# Allegro board 20230215_beagleplayv022_10.brd
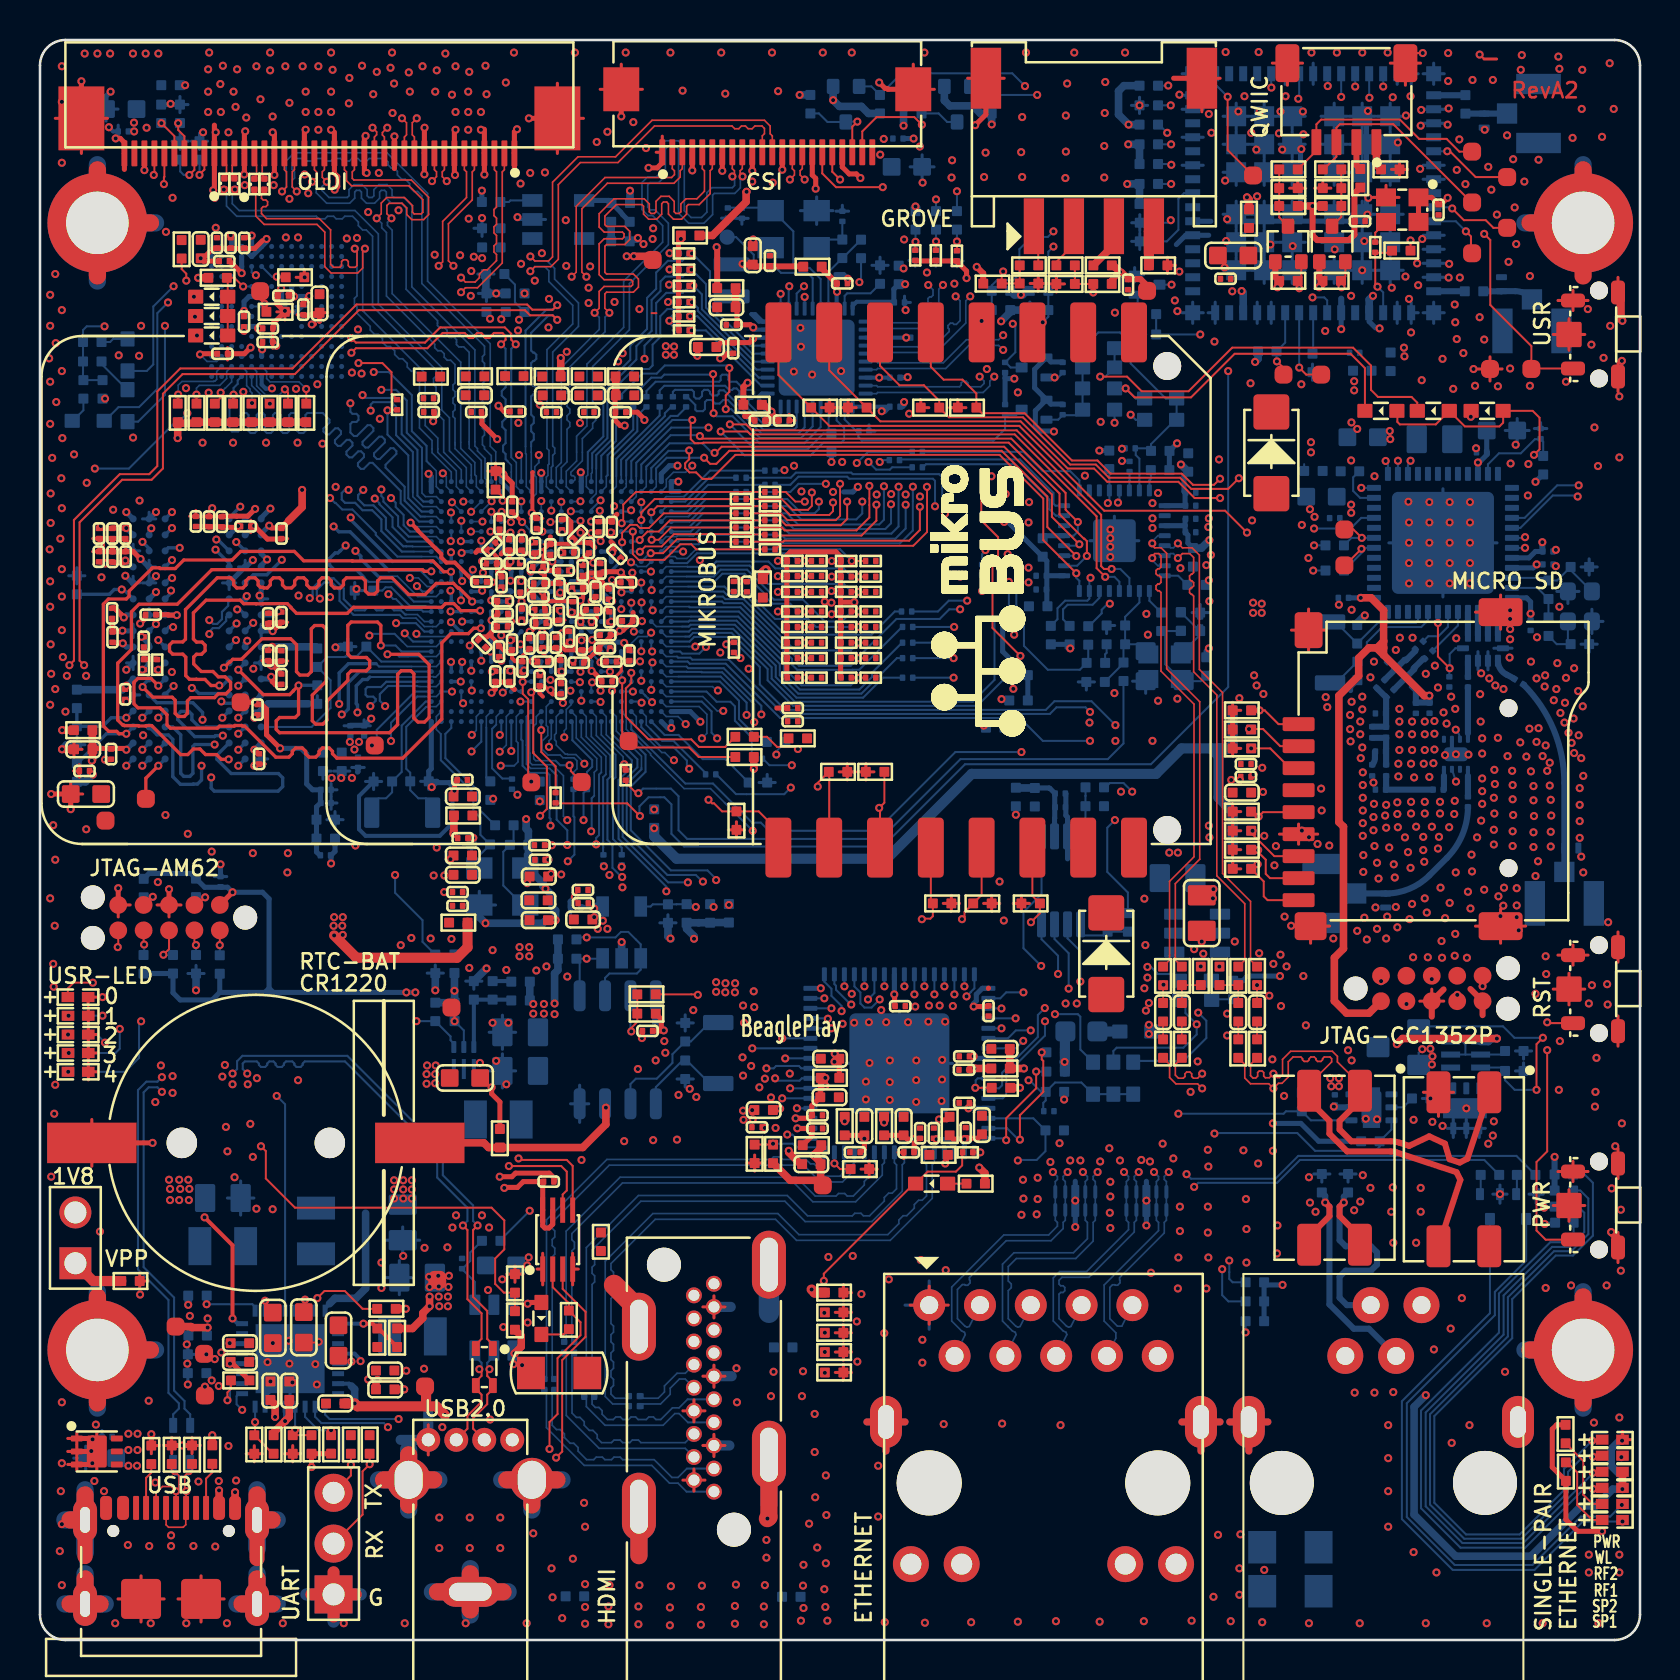
[diagram p0: board, top side]
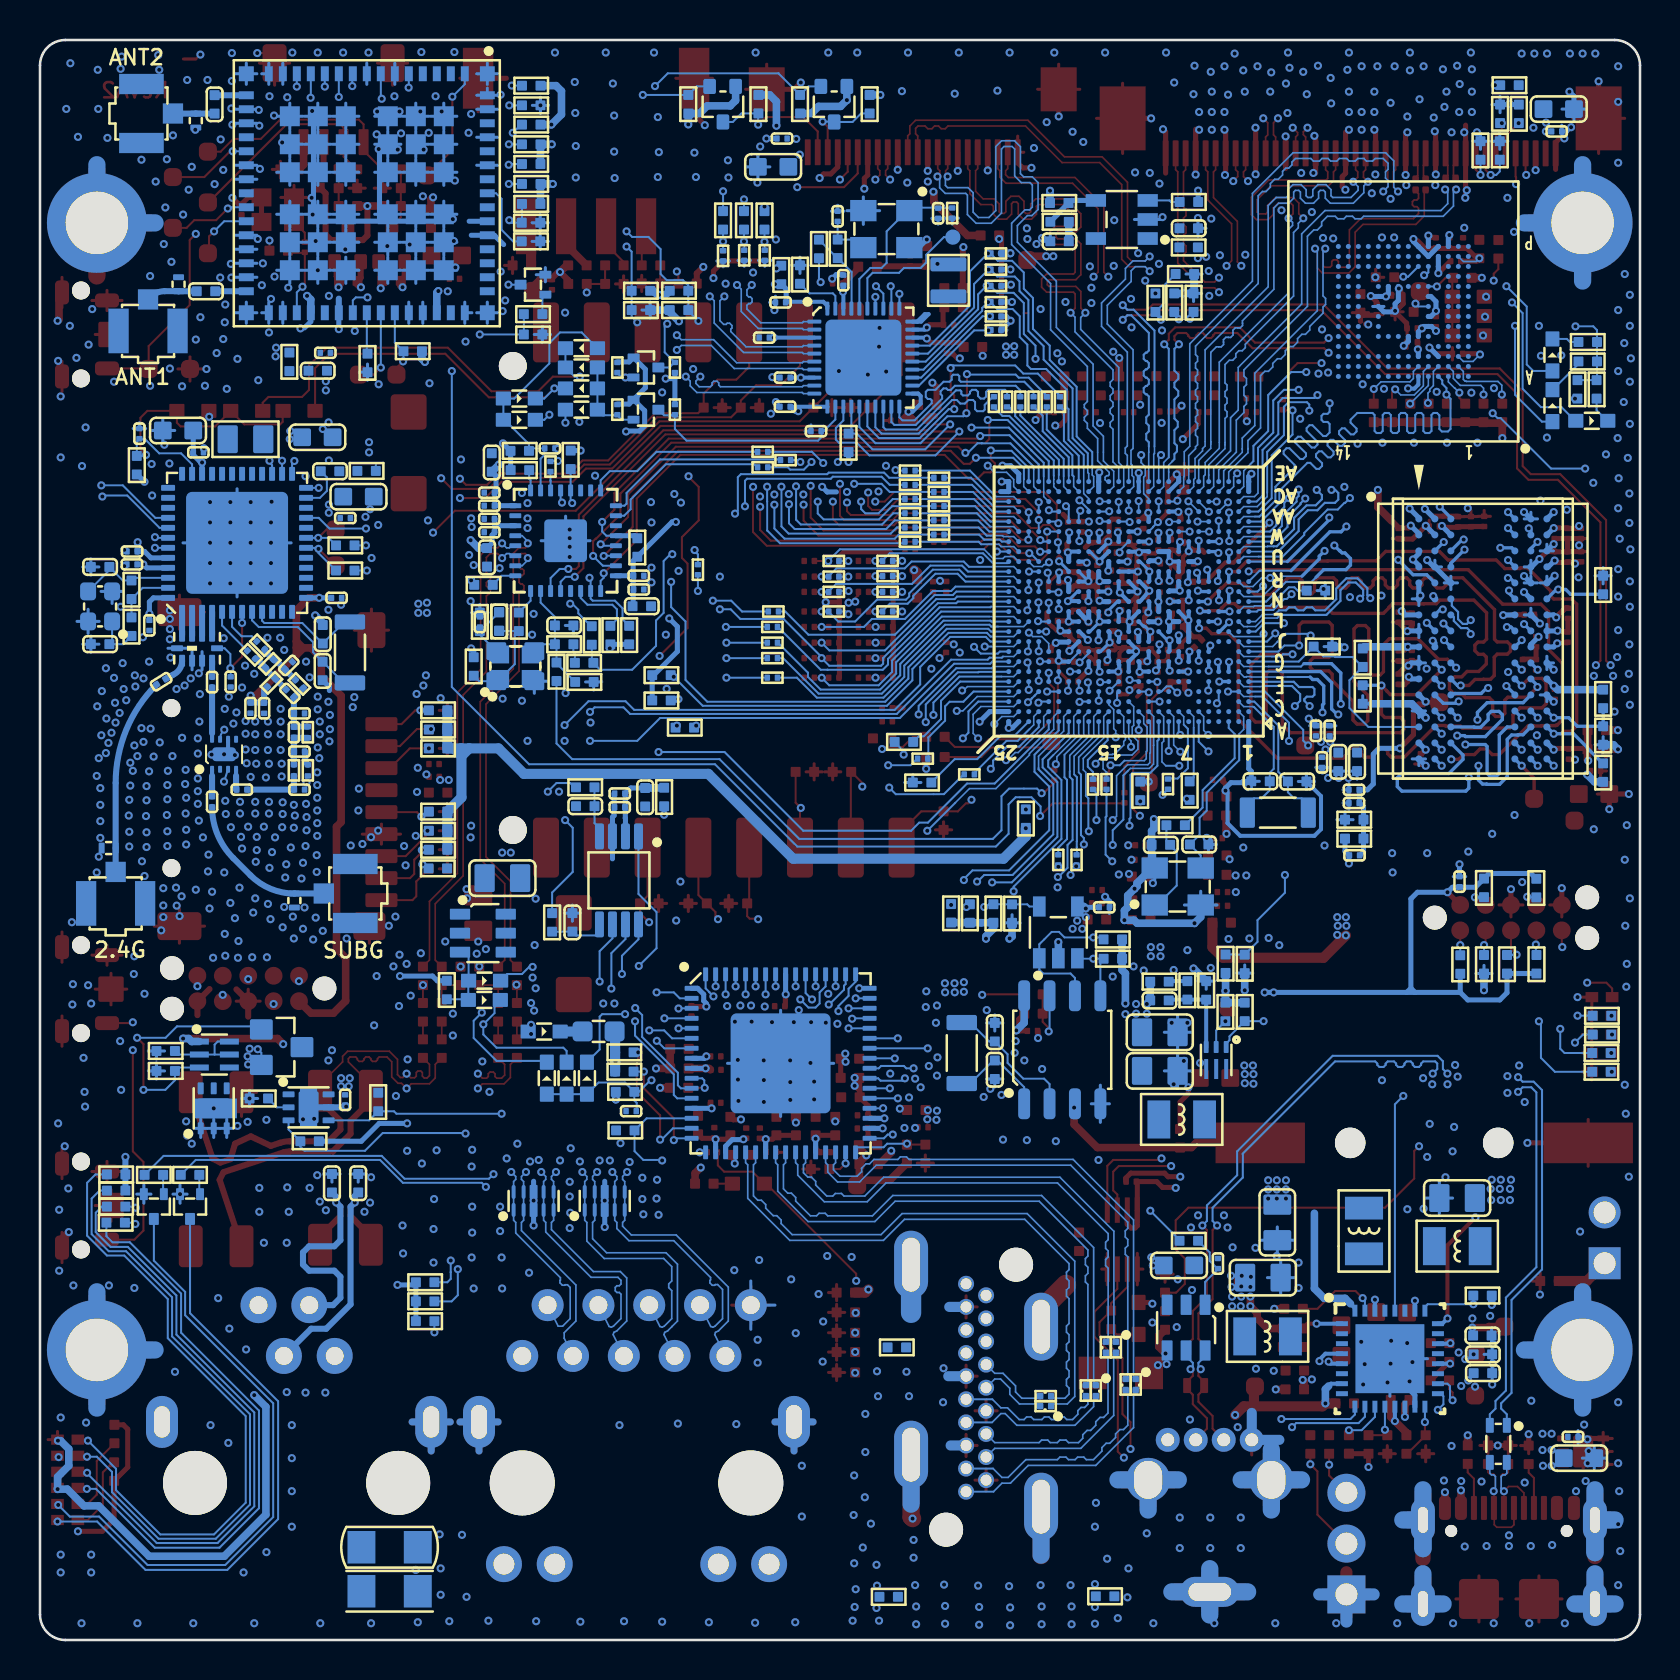
[diagram p1: board, bottom side, seen from below]

Outline 80 x 80 mm; copper layers: TOP, LYR2_GND, LYR3, LAY4_PWR1, LAY5_PWR2, LAY6, LYR7_GND, BOTTOM. Coordinates in mm from the lower left corner of the outline.
Outline path: 0,78.73 0,1.27 ; 0,78.73 arc(0.37,79.63) 1.27,80 ; 0,78.73 arc(0.37,79.63) 1.27,80 ; 0,78.73 0,1.27 ; 0,1.27 arc(0.37,0.37) 1.27,0 ; 0,1.27 arc(0.37,0.37) 1.27,0 ; 1.27,80 78.73,80 ; 1.27,80 78.73,80 ; 78.73,80 arc(79.63,79.63) 80,78.73 ; 78.73,80 arc(79.63,79.63) 80,78.73 ; 1.27,0 78.73,0 ; 1.27,0 78.73,0 ; 78.73,0 arc(79.63,0.37) 80,1.27 ; 78.73,0 arc(79.63,0.37) 80,1.27 ; 80,78.73 80,1.27 ; 80,78.73 80,1.27

## Design rules (mm)
constraint set DEFAULT: min track width 0.102
net group BL_PWM_3V3: nets BL_PWM_3V3 N16854428
net group BOOTMODE8: nets BOOTMODE8 VOUT0_D16
net group BOOTMODE9: nets BOOTMODE9 VOUT0_D17
net group BOOTMODE10: nets BOOTMODE10 VOUT0_D18
net group BOOTMODE12: nets BOOTMODE12 VOUT0_D20
net group BOOTMODE14: nets BOOTMODE14 VOUT0_D22
net group BOOTMODE15: nets BOOTMODE15 VOUT0_D23
net group CC1352_LED1: nets CC1352_LED1 N16855237
net group CC1352_LED2: nets CC1352_LED2 N16855239
net group CLS_SD: nets SD_CMD SD_D3
net group CSI0_GPIO2: nets CSI0_GPIO2 N16761119
net group DDR_ADDR_1: nets DDR_ALERTN DDR_TEN
net group DEBUG_RXD: nets DEBUG_RXD N16172168
net group EMMC_CLK: nets EMMC_CLK EMMC_CLK_S
net group GPIO1_10: nets GPIO1_10 N16149646
net group HDMI_TX0+: nets HDMI_TX0+ TX0P
net group HDMI_TX0-: nets HDMI_TX0- TX0M
net group HDMI_TX1+: nets HDMI_TX1+ TX1P
net group HDMI_TX1-: nets HDMI_TX1- TX1M
net group HDMI_TX2+: nets HDMI_TX2+ TX2P
net group HDMI_TX2-: nets HDMI_TX2- TX2M
net group HDMI_TXC+: nets HDMI_TXC+ TXCP
net group HDMI_TXC-: nets HDMI_TXC- TXCM
net group I2C0_SCL: nets I2C0_SCL N17822233
net group I2C1_SDA: nets I2C1_SDA N16835689
net group I2C2_SCL: nets I2C2_SCL N16786885
net group I2C3_SCL: nets I2C3_SCL N16071136
net group LED0: nets LED0 N16199587
net group LED0/CFG_EXT: nets LED0/CFG_EXT N17295734
net group LED1/CFG_LDO0: nets LED1/CFG_LDO0 N17295760
net group LED2: nets LED2 N16199659
net group LED2/CFG_LDO1: nets LED2/CFG_LDO1 N17295713
net group LED_USR0: nets LED_USR0 N16855227
net group LED_USR1: nets LED_USR1 N16855229
net group LED_USR2: nets LED_USR2 N16855231
net group LED_USR3: nets LED_USR3 N16855233
net group LED_USR4: nets LED_USR4 N16855235
net group MCASP1_ACLKX: nets MCASP1_ACLKX N16786926
net group MCASP1_AFSX: nets MCASP1_AFSX N16786954
net group MCASP1_AXR0: nets MCASP1_AXR0 N16786975
net group MCASP1_AXR1: nets MCASP1_AXR1 N16791385
net group MCASP1_AXR2: nets MCASP1_AXR2 N16786907
net group MCASP1_AXR3: nets MCASP1_AXR3 N16791404
net group MDI0: nets MDI0+ MDI0-
net group MDI1: nets MDI1+ MDI1-
net group MDI2: nets MDI2+ MDI2-
net group MDI3: nets MDI3+ MDI3-
net group N8507580: nets N8507580 N16164784
net group N8507584: nets N8507584 N16165479
net group N15956167: nets N15956167 N15956457
net group N15956763: nets N15956763 N15956767
net group N15956943: nets N15956943 N15956969
net group N15968666: nets N15968666 N15969255
net group N16005116: nets N16005116 N16005124
net group N16034871: nets N16034871 N17270663
net group N16199595: nets N16199595 N17845963
net group N16200287: nets N16200287 N17845881
net group N16213274: nets N16213274 N16213278
net group N16855241: nets N16855241 N16855367
net group N16856006: nets N16856006 N16856127
net group OLDI0_CLK0_N: nets N17355388 OLDI0_CLK0_N
net group OLDI0_CLK0_P: nets N17355379 OLDI0_CLK0_P
net group OLDI0_CLK1_N: nets N17355524 OLDI0_CLK1_N
net group OLDI0_CLK1_P: nets N17355497 OLDI0_CLK1_P
net group PMIC_LPM_EN0: nets N16004890 PMIC_LPM_EN0
net group PSE_P: nets PSE_N PSE_P
net group QWIIC_SCL: nets N16785638 QWIIC_SCL
net group QWIIC_SDA: nets N16785653 QWIIC_SDA
net group RGMII1_TD0: nets RGMII1_TD0 TXD0
net group RGMII1_TD1: nets RGMII1_TD1 TXD1
net group RGMII1_TD2: nets RGMII1_TD2 TXD2
net group RGMII1_TD3: nets RGMII1_TD3 TXD3
net group RGMII1_TX_CTL: nets RGMII1_TX_CTL TXCTL
net group RGMII1_TXC: nets RGMII1_TXC TXC
net group RMII2_TX_EN: nets RMII2_TX_EN SPE_TX_EN
net group RMII2_TXD0: nets RMII2_TXD0 SPE_TX_D0
net group RMII2_TXD1: nets RMII2_TXD1 SPE_TX_D1
net group RTC_INT: nets N16856066 RTC_INT
net group SD_CLK: nets N8487606 SD_CLK
net group UART6_RXD: nets N15962009 UART6_RXD
net group UART6_TXD: nets N15961979 UART6_TXD
net group USB0_DP: nets USB0_DM USB0_DP
net group USB1_DP: nets USB1_DM USB1_DP
net group USB1_DRVVBUS: nets N16650018 USB1_DRVVBUS
net group USB_A_DP: nets USB_A_DM USB_A_DP
net group USB_C_DP: nets USB_C_DM USB_C_DP
net group VOUT0_D0: nets N17701596 VOUT0_D0
net group VOUT0_D1: nets N17701573 VOUT0_D1
net group VOUT0_D2: nets N17701550 VOUT0_D2
net group VOUT0_D5: nets N17701481 VOUT0_D5
net group VOUT0_D6: nets N17701458 VOUT0_D6
net group VOUT0_D7: nets N17701435 VOUT0_D7
net group VOUT0_D8: nets N17701412 VOUT0_D8
net group VOUT0_D11: nets N17701343 VOUT0_D11
net group VOUT0_D12: nets N17701320 VOUT0_D12
net group VOUT0_D13: nets N17701297 VOUT0_D13
net group VOUT0_DE: nets N17701737 VOUT0_DE
net group VOUT0_HSYNC: nets N17701791 VOUT0_HSYNC
net group VOUT0_PCLK: nets N16120392 VOUT0_PCLK
net group VOUT0_VSYNC: nets N17701764 VOUT0_VSYNC
net group WL_CLK: nets N8498391 WL_CLK
net group WL_EN: nets N16855418 WL_EN
net group XO: nets N15938564 XO
net group BOOTMODE11: nets BOOTMODE3 BOOTMODE11 BOOTMODE13 N16788057 N16788120 N17041478 USER_BTN VOUT0_D19 VOUT0_D21
net group CC1352_RESET_N: nets CC1352_RESET_N CC1352_RSTN EMMC_RSTN GBE_RSTN HDMI_RSTN N8502406 N16005478 N17096912 N17316096 PORZ_OUT RESETN RESETSTATZ RST_N_N SD_PWR_EN SPE_RSTN
net group CLKOUT: nets CLKOUT CLKOUT0 N16100484 RMII2_REF_CLK RMII2_REF_CLK1 RMII2_REF_CLK2 XI
net group DDR_ADDR: nets DDR_A0 DDR_A1 DDR_A2 DDR_A3 DDR_A4 DDR_A5 DDR_A6 DDR_A7 DDR_A8 DDR_A9 DDR_A10 DDR_A11 DDR_A12 DDR_A13 DDR_A14_WEN DDR_A15_CAS DDR_A16_RAS DDR_ACTN DDR_BA0 DDR_BA1 DDR_CKE DDR_CSN DDR_ODT DDR_PARITY DDR_RESET#
net group DVI_+5V: nets DVI_+5V HDMI_DSCL HDMI_DSDA N17226817
net group HDMI_CEC: nets HDMI_CEC HDMI_CEC_D N8554336
net group I2C1_SCL: nets I2C1_SCL N16149634 N16835674 N17822331
net group MCU_OBSCLK0: nets MCU_OBSCLK0 N16822608 N17297363 XTAL_OUT
net group MG1_CSI: nets CAM_CK_N CAM_CK_P CAM_D0_N CAM_D0_P CAM_D1_N CAM_D1_P CAM_D2_N CAM_D2_P CAM_D3_N CAM_D3_P
net group MG1_DDR_D0: nets DDR_DQ0 DDR_DQ1 DDR_DQ2 DDR_DQ3 DDR_DQ4 DDR_DQ5 DDR_DQ6 DDR_DQ7 DDR_LDM
net group MG1_DDR_D1: nets DDR_DQ8 DDR_DQ9 DDR_DQ10 DDR_DQ11 DDR_DQ12 DDR_DQ13 DDR_DQ14 DDR_DQ15 DDR_UDM
net group MG1_OLDI_0: nets OLDI0_A0_N OLDI0_A0_P OLDI0_A1_N OLDI0_A1_P OLDI0_A2_N OLDI0_A2_P OLDI0_A3_N OLDI0_A3_P
net group MG1_OLDI_1: nets OLDI0_A4_N OLDI0_A4_P OLDI0_A5_N OLDI0_A5_P OLDI0_A6_N OLDI0_A6_P OLDI0_A7_N OLDI0_A7_P
net group MG1_RGMII_RX: nets RGMII1_RD0 RGMII1_RD1 RGMII1_RD2 RGMII1_RD3 RGMII1_RX_CTL RGMII1_RXC
net group N15956835: nets N15956835 N15956977 N15957113 N15957129 N15957145 N15957153 N15957165 N15957501 N15957559
net group N15957295: nets N15957295 N15957337 N15957739
net group POWER: nets N16785667 N16835703 N17701216 N17701257 N17701366 N17701389 N17701504 N17701527 PWR_BTN
net group RX_N: nets N15941865 N15941883 N15942117 N15942316 N15942320 RX_N TX_N
net group RX_P: nets N15941863 N15941871 N15942115 N15942312 N15942332 RX_P TX_P
net group SD: nets SD_D0 SD_D1 SD_D2
net group USB1_VBUS: nets USB1_VBUS
net group VOUT0_D3: nets VOUT0_D3
net group VOUT0_D4: nets VOUT0_D4
net group VOUT0_D9: nets VOUT0_D9
net group VOUT0_D10: nets VOUT0_D10
net group VOUT0_D14: nets VOUT0_D14
net group VOUT0_D15: nets VOUT0_D15
net group WKUP_CLKOUT0: nets N8521467 N8521963 N16005316 WKUP_CLKOUT0

## Placement (name value [footprint] x y rotation side)
B1  0900PC15A0036E  [BF10_0D5_2X1D25X1MM]  72.15 49.59 90 bottom
C1  33pF  [C0402]  57.04 50.92 90 bottom
C2  33pF  [C0402]  53.8 50.73 180 bottom
C3  10nF  [C0201]  57.54 55.39 0 bottom
C4  100nF  [C0201]  57.54 56.06 0 bottom
C5  1uF  [C0402]  57.65 54.13 270 bottom
C6  10nF  [C0201]  50.06 52.53 180 bottom
C7  100nF  [C0201]  50.06 53.21 180 bottom
C8  1uF  [C0402]  49.91 51.69 180 bottom
C9  10nF  [C0201]  57.54 57.37 0 bottom
C10  100nF  [C0201]  57.54 56.72 0 bottom
C11  1uF  [C0402]  57.41 58.88 90 bottom
C12  220nF  [C0402]  57.1 31.39 270 top
C13  220nF  [C0402]  56.16 31.39 270 top
C14  4.7nF  [C0402]  59.92 31.39 270 top
C15  4.7nF  [C0402]  60.85 31.39 270 top
C16  100pF  [C0402]  64.09 22.84 90 bottom
C17  100pF  [C0402]  65.4 22.84 90 bottom
C18  100pF  [C0201]  70.47 47.91 270 bottom
C19  100pF  [C0201]  71.4 47.9 270 bottom
C20  100nF  [C0201]  75.03 60.32 90 bottom
C21  100pF  [C0201]  71.4 41.91 270 bottom
C22  100pF  [C0201]  69.48 46.6 270 bottom
C23  10nF  [C0201]  68.8 46.59 270 bottom
C24  22uF  [C0603]  66.13 60.14 180 bottom
C25  100pF  [C0201]  69.91 42.52 180 bottom
C26  2.4pF  [C0201]  67.51 47.33 225 bottom
C27  0.8pF  [C0201]  67.31 45.39 270 bottom
C28  3pF  [C0201]  67.03 44.42 180 bottom
C29  4.7pF  [C0201]  67.03 42.52 180 bottom
C30  2.4pF  [C0201]  67.56 48.73 135 bottom
C31  3.9pF  [C0201]  67.03 46.33 180 bottom
C32  1uF  [C0402]  65.5 58.44 180 bottom
C33  24pF  [C0402]  65.87 48.45 270 bottom
C34  24pF  [C0402]  65.86 50.29 90 bottom
C35  7.5pF  [C0402]  77 49.79 0 bottom
C36  7.5pF  [C0402]  77 53.65 0 bottom
C37  22uF  [C0603]  64.08 57.17 180 bottom
C38  100nF  [C0201]  64.74 56.1 180 bottom
C39  100nF  [C0201]  65.17 52.11 180 bottom
C40  100nF  [C0201]  75.4 54.43 0 bottom
C41  100nF  [C0201]  72.08 59.39 180 bottom
C42  100nF  [C0201]  75.4 53.78 0 bottom
C43  100nF  [C0201]  74.53 50.73 270 bottom
C44  10uF  [C0603]  3.05 9.09 180 bottom
C45  12pF  [C0201]  73.95 47.92 328 bottom
C46  2.2uF  [C0402]  7.88 15.22 180 bottom
C47  2.2uF  [C0402]  7.86 14.28 180 bottom
C48  2.2uF  [C0402]  7.86 13.34 180 bottom
C49  2.2uF  [C0402]  14.76 11.83 180 top
C50  47uF  [C0805]  18.86 18.12 180 bottom
C51  22uF  [C0805]  56.88 38.09 0 bottom
C52  2.2uF  [C0402]  11.52 12.47 90 top
C53  2.2uF  [C0402]  12.46 12.47 90 top
C54  47uF  [C0805]  9.14 22.1 0 bottom
C55  100nF  [C0201]  25.44 22.92 0 top
C56  100nF  [C0201]  51.01 42.33 0 bottom
C57  22uF  [C0805]  58.09 36.35 270 top
C58  100nF  [C0201]  12.07 55.33 270 top
C59  100nF  [C0201]  3.56 44.3 270 top
C60  47uF  [C0805]  18.14 20.88 270 bottom
C61  100nF  [C0201]  46.21 28.51 180 top
C62  10uF  [C0603]  14.93 14.97 90 top
C63  10uF  [C0603]  13.19 15.63 270 top
C64  10uF  [C0603]  11.64 15.61 270 top
C65  100nF  [C0201]  12.17 67.22 180 top
C66  100nF  [C0201]  13.17 66.52 270 top
C67  100nF  [C0201]  10.2 65.92 90 top
C68  100nF  [C0201]  11.39 65.58 0 top
C69  4.7uF  [C0402]  13.98 66.83 270 top
C70  100nF  [C0201]  9.53 69.86 270 top
C71  100nF  [C0201]  8.85 69.86 270 top
C72  100nF  [C0201]  10.21 69.86 270 top
C73  100nF  [C0201]  11.39 64.9 0 top
C74  100nF  [C0201]  9.22 68.94 180 top
C75  4.7uF  [C0402]  8.04 69.55 270 top
C76  100nF  [C0201]  9.12 64.31 0 top
C77  4.7uF  [C0402]  60.1 42.37 180 top
C78  100nF  [C0201]  60.3 43.8 180 top
C79  100nF  [C0201]  60.3 43.16 180 top
C80  2.2uF  [C0402]  2.16 44.54 180 top
C81  100nF  [C0201]  3.62 54.16 90 top
C82  10nF  [C0201]  5.19 49.91 90 top
C83  10uF  [C0603]  59.66 69.23 180 top
C84  100nF  [C0201]  59.28 68.06 180 top
C85  100nF  [C0201]  65.74 64.36 180 bottom
C86  2.2uF  [C0402]  66.12 63.47 180 bottom
C87  100nF  [C0201]  69.93 71.51 270 top
C88  22pF  [C0201]  35.1 71.34 270 bottom
C89  22pF  [C0201]  40.12 71.19 90 bottom
C90  100nF  [C0201]  41.2 60.44 180 bottom
C91  4.7uF  [C0402]  34.32 66.64 180 top
C92  100nF  [C0201]  34.57 65.76 180 top
C93  1uF  [C0201]  36 60.97 180 top
C94  100nF  [C0201]  37.21 60.98 0 top
C95  4.7uF  [C0402]  33.36 64.65 180 top
C96  22uF  [C0603]  73.1 60.48 0 bottom
C97  1nF  [C1206]  62.52 4.64 180 bottom
C98  120pF  [C0402]  24.03 31.98 0 bottom
C99  100nF  [C0201]  12.07 48.04 90 top
C100  100nF  [C0201]  3.62 50.14 90 top
C101  100nF  [C0201]  2.22 43.46 180 top
C102  100nF  [C0201]  3.62 55.33 270 top
C103  2.2uF  [C0402]  17.26 13.47 0 top
C104  10uF  [C0402]  38.57 23.79 180 top
C105  100pF  [C0201]  11.41 49.23 270 top
C106  100pF  [C0201]  7.79 55.93 90 top
C107  100nF  [C0201]  34.66 64.59 270 top
C108  1uF  [C0201]  42.97 66.88 0 bottom
C109  22uF  [C0603]  2.3 42.3 180 top
C110  100uF  [C1206]  25.96 13.35 0 top
C111  10uF  [C0603]  23.05 18.73 180 bottom
C112  2.2uF  [C0402]  10 13.9 0 top
C113  2.2uF  [C0402]  17.26 12.53 0 top
C114  100nF  [C0201]  8.45 55.92 90 top
C115  100nF  [C0201]  3.61 51.33 270 top
C116  100nF  [C0201]  12.07 51.14 270 top
C117  100nF  [C0201]  10.96 44.06 270 top
C118  100nF  [C0201]  4.26 47.29 270 top
C119  100nF  [C0201]  5.54 51.27 180 top
C120  100nF  [C0201]  12.07 49.21 270 top
C121  100nF  [C0201]  14.27 39.24 180 bottom
C122  100nF  [C0201]  14.3 41.85 0 bottom
C123  100nF  [C0201]  10.88 46.52 270 top
C124  100nF  [C0201]  14.3 42.51 0 bottom
C125  2.2uF  [C0402]  10 14.84 0 top
C126  20pF  [C0402]  18.97 42.94 0 bottom
C127  20pF  [C0402]  17.14 42.93 180 bottom
C128  8pF  [C0402]  22.04 39.78 180 bottom
C129  8pF  [C0402]  23.96 39.76 0 bottom
C130  100nF  [C0201]  3.35 10.16 180 bottom
C131  100nF  [C0201]  21.1 18.82 90 bottom
C132  10uF  [C0402]  24.92 36.98 0 top
C133  10uF  [C0603]  21.25 28.1 0 top
C134  22uF  [C0805]  24.01 30.39 180 bottom
C135  22uF  [C0805]  24.01 28.46 180 bottom
C136  1uF  [C0201]  23.47 48.18 270 top
C137  1uF  [C0201]  25.14 48.92 0 top
C138  1uF  [C0201]  29.47 49.23 270 top
C139  1uF  [C0201]  28.57 48.92 0 top
C140  1uF  [C0201]  22.57 53.82 0 top
C141  1uF  [C0201]  29.3 52.88 0 top
C142  1uF  [C0201]  27.93 55.66 90 top
C143  1uF  [C0201]  28.26 50.24 0 top
C144  1uF  [C0201]  26.94 48.87 0 top
C145  100nF  [C0201]  21.12 43.01 180 top
C146  10nF  [C0201]  22.77 48.18 270 top
C147  4.7uF  [C0402]  21.14 42.17 180 top
C148  100nF  [C0201]  29.04 61.39 0 top
C149  10nF  [C0201]  26.43 54.37 0 top
C150  4.7uF  [C0402]  29.25 62.23 0 top
C151  100nF  [C0201]  25.57 61.39 0 top
C152  10nF  [C0201]  24.75 54.61 270 top
C153  4.7uF  [C0402]  25.6 62.23 0 top
C154  100nF  [C0201]  28.35 47.93 0 top
C155  100nF  [C0201]  19.43 62.09 180 top
C156  10nF  [C0201]  23.73 53.83 180 top
C157  1uF  [C0201]  19.44 61.4 180 top
C158  100nF  [C0201]  34.69 52.68 90 top
C159  10nF  [C0201]  26.18 53.48 180 top
C160  1uF  [C0201]  35.35 52.66 90 top
C161  100nF  [C0201]  37.64 46.6 0 top
C162  10nF  [C0201]  25.94 51.25 270 top
C163  1uF  [C0201]  37.64 45.94 0 top
C164  100nF  [C0201]  20.88 37.4 0 top
C165  10nF  [C0201]  24.1 51.3 90 top
C166  1uF  [C0201]  20.88 36.71 0 top
C167  100nF  [C0201]  24.09 54.75 270 top
C168  10nF  [C0201]  23.45 54.76 270 top
C169  1uF  [C0201]  23.76 61.43 180 top
C170  100nF  [C0201]  27.45 61.39 0 top
C171  10nF  [C0201]  26.1 55.77 90 top
C172  4.7uF  [C0402]  27.42 62.23 0 top
C173  100nF  [C0201]  21.81 61.4 180 top
C174  10nF  [C0201]  23.61 56.66 90 top
C175  4.7uF  [C0402]  21.75 62.24 180 top
C176  100nF  [C0201]  25.98 52.57 90 top
C177  1uF  [C0201]  21.14 40.09 0 top
C178  4.7uF  [C0402]  24.94 35.99 0 top
C179  4.7uF  [C0402]  21.14 39.23 0 top
C180  100nF  [C0201]  25.79 49.87 270 top
C181  100nF  [C0201]  22.98 55.8 90 top
C182  100nF  [C0201]  23.14 51.95 180 top
C183  100nF  [C0201]  26.45 50.18 270 top
C184  100nF  [C0201]  27.56 51.51 0 top
C185  100nF  [C0201]  24.47 49.82 270 top
C186  100nF  [C0201]  27.78 52.42 90 top
C187  100nF  [C0201]  25 51.51 0 top
C188  100nF  [C0201]  27.31 50.85 0 top
C189  100nF  [C0201]  25.05 50.85 0 top
C190  100nF  [C0201]  27.45 54.61 90 top
C191  100nF  [C0201]  27.14 53.48 270 top
C192  100nF  [C0201]  24.9 53.65 0 top
C193  100nF  [C0201]  22.6 54.68 225 top
C194  100nF  [C0201]  22.95 49.42 90 top
C195  100nF  [C0201]  24.95 52.83 0 top
C196  100nF  [C0201]  24.92 52.17 0 top
C197  100nF  [C0201]  24.02 52.65 270 top
C198  100nF  [C0201]  25.52 54.53 90 top
C199  100nF  [C0201]  26.64 51.66 90 top
C200  100nF  [C0201]  26.88 52.58 0 top
C201  100nF  [C0201]  27.1 49.76 270 top
C202  100nF  [C0201]  25.13 49.87 270 top
C203  10uF  [C0402]  21.14 38.26 0 top
C204  1uF  [C0402]  22.57 70.59 180 bottom
C205  100nF  [C0201]  22.09 49.82 135 top
C206  4.7uF  [C0402]  27.16 36.03 180 top
C207  1uF  [C0201]  27.16 36.84 180 top
C208  100nF  [C0201]  24.83 55.83 90 top
C209  100nF  [C0201]  27.15 37.5 180 top
C210  100nF  [C0201]  26.03 48.72 90 top
C211  100nF  [C0201]  29.38 50.95 0 top
C212  100nF  [C0201]  23.61 49.77 270 top
C213  100nF  [C0201]  28.46 51.15 90 top
C214  4.7uF  [C0402]  24.94 38.18 180 top
C215  1uF  [C0201]  25 39.01 180 top
C216  100nF  [C0201]  24.12 48.66 90 top
C217  100nF  [C0201]  28.02 53.57 270 top
C218  100nF  [C0201]  28.44 52.3 90 top
C219  100nF  [C0201]  28.24 49.59 180 top
C220  100nF  [C0201]  26.88 55.24 225 top
C221  100nF  [C0201]  24.98 47.97 270 top
C222  100nF  [C0201]  28.85 54.29 135 top
C223  100nF  [C0201]  28.59 55.65 90 top
C224  4.7uF  [C0402]  15.09 43.91 270 bottom
C225  1uF  [C0201]  15.9 43.88 270 bottom
C226  100nF  [C0201]  23.08 52.9 90 top
C227  100nF  [C0201]  23.14 51.32 180 top
C228  100nF  [C0201]  23.12 50.67 180 top
C229  100nF  [C0201]  15.52 45.46 90 bottom
C230  100nF  [C0201]  16.21 45.46 90 bottom
C231  10uF  [C0402]  14.15 43.91 270 bottom
C232  10nF  [C0201]  51.02 41.64 0 bottom
C233  1uF  [C0402]  49.74 42.14 270 bottom
C234  100pF  [C0402]  52.74 41.69 0 bottom
C235  100pF  [C0402]  53.38 35.88 90 bottom
C236  100nF  [C0201]  54.51 59.58 180 bottom
C237  10uF  [C0402]  39.5 29.06 180 top
C238  10uF  [C0402]  48.03 29.56 180 top
C239  100nF  [C0201]  40.75 24.39 180 top
C240  100nF  [C0201]  46.22 29.18 180 top
C241  100nF  [C0201]  38.87 26.23 0 top
C242  100nF  [C0201]  43.01 31.69 0 top
C243  100nF  [C0201]  46.21 26.86 180 top
C244  10uF  [C0402]  36.19 26.5 0 top
C245  100nF  [C0201]  35.85 25.64 0 top
C246  47pF  [C0201]  9.1 55.91 90 top
C247  100nF  [C0201]  46.29 25.37 90 top
C248  100nF  [C0201]  43.44 24.39 180 top
C249  100nF  [C0201]  47.43 31.45 270 top
C250  10uF  [C0402]  47.1 25.75 90 top
C251  100nF  [C0201]  38.88 25.58 0 top
C252  10uF  [C0402]  43.18 25.7 90 top
C253  100nF  [C0201]  54.4 67.77 270 top
C254  100nF  [C0201]  58.01 50.9 90 bottom
C255  100nF  [C0201]  66 70.94 0 top
C256  100pF  [C0402]  71.27 76.78 270 bottom
C257  100pF  [C0402]  71.7 67.44 0 bottom
C258  10uF  [C0603]  43.35 73.66 0 bottom
C259  100nF  [C0201]  42.9 75.07 0 bottom
C260  100nF  [C0201]  9.03 37.92 90 bottom
C261  2.7pF  [C0402]  32.26 28.51 270 bottom
C262  100nF  [C0201]  64.74 27 270 bottom
C263  1uF  [C0402]  29.02 69.94 0 bottom
C264  100nF  [C0201]  30.38 30.45 180 top
C265  2.7pF  [C0402]  32.26 30.39 90 bottom
C266  100nF  [C0201]  26.79 36.64 180 bottom
C267  100nF  [C0201]  4.17 75.43 180 bottom
C268  10uF  [C0603]  4.06 76.55 180 bottom
C269  1nF  [C0201]  44.01 25.34 90 top
C270  100nF  [C0201]  24.98 39.74 180 top
C271  10uF  [C0402]  41.22 25.7 90 top
C272  100nF  [C0201]  26.05 47.57 270 top
C273  100nF  [C0201]  22.07 52.91 180 top
C274  100nF  [C0201]  50.44 26.44 0 bottom
C275  10uF  [C0402]  39.48 27.14 0 top
C276  100nF  [C0201]  44.69 25.34 90 top
C277  10pF  [C0201]  4.29 54.17 90 top
C278  10pF  [C0201]  2.95 55.33 270 top
C279  10pF  [C0201]  11.41 51.09 270 top
C280  47pF  [C0201]  2.94 54.17 90 top
C281  1nF  [C0201]  4.27 55.33 270 top
C282  1nF  [C0201]  10.28 55.68 0 top
C294  100nF  [C0201]  42.75 61.67 0 bottom
C295  1uF  [C0201]  40.11 67.83 0 top
C296  100nF  [C0201]  42.75 63.12 0 bottom
C297  100nF  [C0201]  43.79 65.12 0 bottom
C298  100nF  [C0201]  39.84 67.99 90 bottom
C299  4.7uF  [C0402]  35.64 69.23 90 top
C300  100nF  [C0201]  36.5 68.96 90 top
D1  TPD4E05U06DQAR  [USON10_0D5_2D5X1X0D5MM]  55.32 21.95 180 bottom
D2  TPD4E05U06DQAR  [USON10_0D5_2D5X1X0D5MM]  51.77 21.95 180 bottom
D3  RB520S30T1G  [SOD_523]  72.36 61.46 180 top
D4  ESDPSA0402V05  [D0402]  39.71 16.38 180 top
D5  ESDPSA0402V05  [D0402]  39.71 17.37 180 top
D7  TPD1E1B04DPY  [D0402]  39.71 13.38 180 top
D8  TPD1E1B04DPY  [D0402]  15.54 9.78 270 top
D9  TPD1E1B04DPY  [D0402]  60.1 39.52 0 top
D10  TPD1E1B04DPY  [D0402]  16.48 9.78 270 top
D11  RB520S30T1G  [SOD_523]  69.67 61.46 180 top
D12  RB520S30T1G  [SOD_523]  67.05 61.46 180 top
D13  TPD1E1B04DPY  [D0402]  60.1 40.46 0 top
D14  TPD1E1B04DPY  [D0402]  60.1 41.42 0 top
D15  TPD1E1B04DPY  [D0402]  60.1 44.58 0 top
D16  TPD1E1B04DPY  [D0402]  60.1 45.52 0 top
D17  TPD1E1B04DPY  [D0402]  60.1 46.48 0 top
D18  TPD1E1B04DPY  [D0402]  60.1 38.56 0 top
D19  TPD1E1B04DPY  [D0402]  51.28 67.81 0 top
D20  TPD1E1B04DPY  [D0402]  49.45 67.83 180 top
D21  B130L-13-F  [DO_214AC_SMA]  53.31 34.32 90 top
D22  B130L-13-F  [DO_214AC_SMA]  61.57 59.36 90 top
D23  RB520S30T1G  [SOD_523]  4.38 61.72 90 bottom
D24  TPD1E1B04DPY  [D0402]  7.6 9.26 270 top
D25  TPD1E1B04DPY  [D0402]  6.59 9.26 270 top
D26  TPD1E1B04DPY  [D0402]  23 25.09 270 top
D27  TPD1E0B04DPY  [X1SON2_0D65_1X0_6X0_45MM]  76.57 39.6 180 bottom
D28  TPD1E0B04DPY  [X1SON2_0D65_1X0_6X0_45MM]  67.28 36.97 90 bottom
D29  TPD1E1B04DPY  [D0402]  64.6 72.59 0 top
D30  TPD1E1B04DPY  [D0402]  62.42 72.59 180 top
D31  TPD1E1B04DPY  [D0402]  34.82 40.97 90 top
D32  RB520S30T1G  [SOD_523]  52.93 61.52 0 bottom
D33  RB520S30T1G  [SOD_523]  52.93 63.63 0 bottom
D34  RB520S30T1G  [SOD_523]  52.93 64.59 0 bottom
D35  RB520S30T1G  [SOD_523]  53.67 28.09 90 bottom
D36  TPD1E1B04DPY  [D0402]  39.02 61.62 180 top
D37  TPD1E1B04DPY  [D0402]  40.87 61.62 0 top
D38  TPD1E1B04DPY  [D0402]  44.5 61.62 0 top
D39  TPD1E1B04DPY  [D0402]  46.36 61.62 0 top
D40  TPD1E1B04DPY  [D0402]  48.05 66.5 180 bottom
D41  TPD1E1B04DPY  [D0402]  49.53 36.83 0 top
D42  TPD1E1B04DPY  [D0402]  47.12 36.83 180 top
D43  TPD1E1B04DPY  [D0402]  45.11 36.83 180 top
D44  TPD1E1B04DPY  [D0402]  41.76 43.41 0 top
D45  TPD1E1B04DPY  [D0402]  39.9 43.41 180 top
D46  RB520S30T1G  [SOD_523]  56.03 62.07 180 bottom
D47  RB520S30T1G  [SOD_523]  8.59 67.17 180 top
D48  RB520S30T1G  [SOD_523]  8.59 66.2 180 top
D49  RB520S30T1G  [SOD_523]  4.38 64.26 90 bottom
D50  RB520S30T1G  [SOD_523]  57.77 32.97 180 bottom
D51  RB520S30T1G  [SOD_523]  57.79 32 180 bottom
D52  TPD1E1B04DPY  [D0402]  49.96 66.5 0 bottom
D53  RB520S30T1G  [SOD_523]  56.03 61.01 180 bottom
D54  RB520S30T1G  [SOD_523]  52.93 62.58 0 bottom
D55  RB520S30T1G  [SOD_523]  54.79 30.42 180 bottom
D56  RB520S30T1G  [SOD_523]  8.59 65.23 180 top
D57  ESDPSA0402V05  [D0402]  39.71 15.36 180 top
D58  RB520S30T1G  [SOD_523]  52.65 28.09 90 bottom
D59  RB520S30T1G  [SOD_523]  54.66 28.09 90 bottom
D60  ESDPSA0402V05  [D0402]  39.71 14.4 180 top
D61  RB520S30T1G  [SOD_523]  25.07 16.08 270 top
D63  RB520S30T1G  [SOD_523]  44.58 22.82 180 top
D66  RB520S30T1G  [SOD_523]  2.41 60.96 180 bottom
D73  TPD1E0B04DPY  [X1SON2_0D65_1X0_6X0_45MM]  72.21 75.97 90 bottom
D74  TPD1E0B04DPY  [X1SON2_0D65_1X0_6X0_45MM]  73.08 67.79 270 bottom
F1  100mA  [F0603]  52.07 30.43 180 bottom
FB1  120R  [L0402]  60.45 71.07 270 top
FB2  120R  [L0402]  67.53 63.91 270 bottom
FB3  120R  [L0402]  55.91 68.73 0 top
FB4  120R  [L0402]  2.16 45.49 0 top
FB5  120R  [L0402]  63.67 58.45 0 bottom
FB6  120R  [L0402]  21.16 41.23 0 top
FB7  120R  [L0402]  29.24 63.18 180 top
FB8  120R  [L0402]  25.58 63.18 180 top
FB9  120R  [L0402]  30.71 41.07 90 bottom
FB10  120R  [L0402]  19.55 63.17 0 top
FB11  120R  [L0402]  36.14 52.58 270 top
FB12  120R  [L0402]  37.89 45.08 180 top
FB13  120R  [L0402]  20.92 35.87 180 top
FB14  120R  [L0402]  23.72 63.2 0 top
FB15  120R  [L0402]  27.43 63.18 180 top
FB16  120R  [L0402]  21.76 63.18 0 top
FB17  120R  [L0402]  48.79 42.15 90 bottom
FB18  120R  [L0402]  39.5 28.11 0 top
FB19  120R  [L0402]  40.24 25.7 90 top
FB20  120R  [L0402]  38.6 24.74 0 top
FB21  120R  [L0402]  6.53 77.74 180 bottom
FB22  120R  [L0402]  45.48 25.7 90 top
FB23  120R  [L0402]  42.21 25.7 90 top
FB24  120R  [L0402]  48.03 28.58 0 top
FB25  120R  [L0402]  53.13 68.73 0 top
FB26  120R  [L0402]  51.28 68.73 0 top
FB27  120R  [L0402]  49.45 68.73 180 top
FB28  120R  [L0402]  62.42 73.53 180 top
FB29  120R  [L0402]  34.32 67.6 0 top
FB30  0R  [R0402]  38.63 68.67 180 top
FB31  0R  [R0402]  35.63 61.76 0 top
FB32  120R  [L0402]  42.94 68.26 90 bottom
FB33  120R  [L0402]  64.6 73.53 0 top
FB34  120R  [L0402]  66.01 73.09 270 top
FB35  120R  [L0402]  67.52 73.53 0 top
FB36  0R  [R0402]  26.75 2.18 0 bottom
FB37  0R  [R0402]  37.57 2.16 180 bottom
FB38  0R  [R0402]  28.05 19.91 270 top
FB39  0R  [R0402]  37.16 14.63 180 bottom
FL2  120R  [L0402]  22.57 69.63 0 bottom
J1  ST-TF-003J  [MICRO_SD_ST_TF_003A_16_1X14_5MM]  62.93 43.54 0 top
J2  LPJE158-0CNL  [RJ11_6P4C_1D27_21_15X13_8X13_3]  67.17 7.85 0 top
J3  U.FL-R-SMT-1(10)  [U-FL3P-SMD-2_6X2_6X1_0MM]  74.93 76.33 180 bottom
J4  TYPE_A  [HDMI19P_1D155_23_1X7_7X16_4MM]  33.2 5.52 0 top
J5  U.FL-R-SMT-1(10)  [U-FL3P-SMD-2_6X2_6X1_0MM]  74.6 65.46 90 bottom
J6  Header 1x3 2.54mm  [HEADER3P_2D54_DIP]  14.68 4.82 180 top
J7  4P-2.0mm-90D  [JST4P_SMD_2_0_90D]  52.7 70.69 0 top
J8  FPC 40pin-0.5mm  [FPC40_0D5_25_4X5_25X2MM]  13.97 74.63 180 top
J9  U.FL-R-SMT-1(10)  [U-FL3P-SMD-2_6X2_6X1_0MM]  64.24 37.33 0 bottom
J10  CR1220  [BAT-CR1220]  10.79 24.86 90 top
J11  TC2050-IDC  [CONNECT10_1D27_12_4X6_7MM]  69.59 32.58 0 top
J12  U.FL-R-SMT-1(10)  [U-FL3P-SMD-2_6X2_6X1_0MM]  76.22 36.83 90 bottom
J13  ST-USB-117A  [USB7P_1R4_14X5R72MM]  21.51 10.01 90 top
J14  TYPE-C 2.0  [USB2_0_TYPE_C]  6.55 6.55 90 top
J16  Header 1x2 2.54mm  [HEADER2P_2D54_DIP]  1.77 20.11 180 top
J17  FPC 22P 0.5mm  [FPC22_0D5_15_4X5_25X2MM_0D5_DX_NPWB]  36.37 74.69 180 top
J18  4P-1.0mm  [JST4P_1D0_6_5X4_35X3_1MM]  65.32 74.9 180 top
J19  TC2050-IDC  [CONNECT10_1D27_12_4X6_7MM]  6.45 36.12 180 top
J21  MikroBus Female  [MIKROBUS16_2D54_25_4X22_88X8_5MM]  45.81 52.5 180 top
J24  LPJG0933H11NL  [RJ45_18P_21_23X15_93X13_3MM]  50.18 7.85 0 top
L1  500uH  [L4P_2D54_9_2X6X5MM]  64.73 23.61 270 top
L2  500uH  [L4P_2D54_9_2X6X5MM]  71.2 23.54 270 top
L3  6.8uH  [L0805]  69.73 60.04 0 bottom
L4  90R  [L2012]  22.22 13.65 270 top
L5  12nH  [L0201]  68.43 47.86 315 bottom
L6  1nH  [L0201]  69.44 49.26 225 bottom
L7  27nH  [L0201]  68.52 48.81 315 bottom
L8  4.7nH  [L0201]  67.31 43.48 270 bottom
L9  3.9nH  [L0201]  66.61 45.39 270 bottom
L10  1nH  [L0201]  68.96 49.74 225 bottom
L11  12nH  [L0201]  67.03 47.81 225 bottom
L12  2.5nH  [L0201]  66.61 43.48 90 bottom
L13  90R  [L2012]  7.08 9.81 270 bottom
L14  0.33uH  [L1008]  18.62 15.18 0 bottom
L15  90R  [L4P_0_85X0_65MM]  10.97 72.78 0 top
L16  0.47uH  [L1008]  13.8 20.45 90 bottom
L17  0.47uH  [L1008]  9.14 19.69 180 bottom
L18  0.47uH  [L1008]  22.92 26.03 0 bottom
L19  2.2uH  [L2016]  34.58 67.98 90 bottom
L20  90R  [L4P_0_85X0_65MM]  9.47 72.83 0 top
L21  90R  [L4P_0_85X0_65MM]  25.47 12.76 0 bottom
L22  90R  [L4P_0_85X0_65MM]  26.46 14.62 0 bottom
L23  90R  [L4P_0_85X0_65MM]  27.46 12.45 0 bottom
L24  90R  [L4P_0_85X0_65MM]  29.74 11.94 90 bottom
LED1  Yellow  [LED0402]  78.62 6.8 0 top
LED2  Green  [LED0402]  78.62 6 0 top
LED3  Green  [LED0402]  1.9 32.15 0 top
LED4  Green  [LED0402]  1.91 31.21 0 top
LED5  Green  [LED0402]  1.91 30.27 0 top
LED6  Green  [LED0402]  1.91 29.35 0 top
LED7  Green  [LED0402]  1.91 28.41 0 top
LED8  Yellow  [LED0402]  78.62 7.61 0 top
LED9  Yellow  [LED0402]  78.62 8.41 0 top
LED10  Yellow  [LED0402]  78.62 9.21 0 top
LED11  Red  [LED0402]  78.62 10.02 0 top
MH1  Hole 3d125MM  [PTH_3_125MM_5]  77.16 14.5 0 top
MH2  Hole 3d125MM  [PTH_3_125MM_5]  2.87 14.5 0 top
MH3  Hole 3d125MM  [PTH_3_125MM_5]  2.87 70.86 0 top
MH4  Hole 3d125MM  [PTH_3_125MM_5]  77.16 70.86 0 top
NOREF  -  []  1.27 0 90 top
NOREF#2  -  []  0 78.73 0 top
NOREF#3  -  []  -86.59 -230.71 0 top
OSC1  32.768kHz  [X4-SMD-2_5X2_0X1_0MM]  68.12 71.52 180 top
OSC2  50MHz  [X4_SMD_2_5X2_0MM]  56.24 48.69 180 bottom
Q3  DMG1012T-7  [SOT_523]  72.5 21.67 180 bottom
Q4  DMG1012T-7  [SOT_523]  74.31 21.67 180 bottom
Q5  CJ3407  [SOT23]  67.92 29.64 270 bottom
Q6  BSS138W  [SOT-323-3]  62.4 69.8 0 top
Q7  BSS138W  [SOT-323-3]  64.6 69.8 0 top
Q8  BSS138W  [SOT-323-3]  40.29 76.79 0 bottom
Q9  BSS138W  [SOT-323-3]  45.86 76.79 0 bottom
Q10  DMG1012T-7  [SOT_523]  55.35 67.77 270 bottom
Q12  BCM857BS-7-F  [SMINI6-F3-B]  71.28 29.27 90 bottom
Q13  DMG1012T-7  [SOT_523]  49.7 61.52 90 bottom
Q14  DMG1012T-7  [SOT_523]  49.7 63.63 90 bottom
R1  240R  [R0402]  1.84 52.75 90 bottom
R2  33R  [R0201]  5.86 48.77 90 top
R3  33R  [R0201]  5.2 48.77 90 top
R4  10K  [R0402]  1.84 43.37 90 bottom
R5  49.9K  [R0402]  13.31 61.36 90 top
R6  49.9K  [R0402]  12.4 61.36 90 top
R7  49.9K  [R0402]  10.57 61.36 90 top
R8  49.9K  [R0402]  7.83 61.36 90 top
R9  49.9K  [R0402]  6.89 61.36 90 top
R10  49.9K  [R0402]  11.48 61.36 90 top
R11  49.9K  [R0402]  9.66 61.36 90 top
R12  49.9K  [R0402]  8.74 61.36 90 top
R13  49.9K  [R0402]  7.08 69.54 270 top
R14  10K  [R0402]  8.88 68.11 0 top
R15  10K  [R0402]  11.78 66.41 0 top
R16  0R  [R0201]  17.86 61.77 90 top
R17  10K  [R0402]  55.45 69.93 180 bottom
R18  10K  [R0402]  55.44 71.81 180 bottom
R19  10K  [R0402]  61.37 64.44 180 bottom
R20  49.9K  [R0402]  12.75 68.14 0 top
R21  10K  [R0402]  60.11 38.58 0 bottom
R22  49.9K  [R0402]  55.44 76.73 180 bottom
R23  10K  [R0402]  55.44 77.72 0 bottom
R24  10K  [R0402]  55.44 75.77 0 bottom
R25  10K  [R0402]  55.44 74.79 0 bottom
R26  10K  [R0402]  55.44 73.8 0 bottom
R27  10K  [R0402]  55.44 72.8 0 bottom
R28  10K  [R0402]  63.63 63.86 270 bottom
R29  10K  [R0402]  55.35 65.28 180 bottom
R30  0R  [R0402]  68.07 69.47 180 top
R31  33R  [R0201]  66.76 69.64 270 top
R32  0R  [R0402]  32.51 70.23 0 top
R33  2.49K  [R0402]  42 68.27 90 bottom
R34  0R  [R0402]  60.74 15.94 180 bottom
R35  0R  [R0402]  43.78 70.98 90 bottom
R36  10K  [R0201]  51.13 61.52 270 bottom
R37  10K  [R0201]  48.26 61.52 270 bottom
R38  1M  [R1206]  62.52 2.44 180 bottom
R39  1K  [R0402]  60.74 16.93 180 bottom
R40  1K  [R0402]  44.8 70.98 90 bottom
R41  4.7K  [R0201]  32.2 66.18 0 bottom
R42  4.7K  [R0201]  32.2 66.18 180 top
R43  4.7K  [R0201]  32.2 66.89 0 bottom
R44  4.7K  [R0201]  32.2 66.89 180 top
R45  4.7K  [R0201]  32.2 67.71 0 bottom
R46  4.7K  [R0201]  32.2 67.71 180 top
R47  4.7K  [R0201]  32.2 65.5 0 bottom
R48  4.7K  [R0201]  32.21 65.48 180 top
R49  33R  [R0201]  30.32 61.91 90 bottom
R50  33R  [R0201]  30.98 61.91 90 bottom
R51  33R  [R0201]  31.64 61.91 90 bottom
R52  33R  [R0201]  32.31 61.91 90 bottom
R53  1K  [R0402]  2.61 64.9 0 bottom
R54  10K  [R0402]  13.58 9.78 90 top
R55  100K  [R0402]  12.64 9.78 270 top
R56  49.9K  [R0402]  73.72 29.45 0 bottom
R57  33R  [R0201]  29 61.91 90 bottom
R58  33R  [R0201]  29.66 61.91 90 bottom
R59  49.9K  [R0402]  73.72 28.45 0 bottom
R60  10K  [R0402]  59.66 32.5 270 bottom
R61  4.7K  [R0201]  32.2 69.33 0 bottom
R62  4.7K  [R0201]  32.2 69.33 180 top
R63  49.9K  [R0402]  46.79 22.82 180 top
R64  2.2k  [R0402]  50.78 29.38 180 bottom
R65  2.2k  [R0402]  50.78 28.42 180 bottom
R66  33K  [R0402]  50.74 25.48 0 bottom
R67  1K  [R0402]  52.74 42.64 180 bottom
R68  1K  [R0402]  54.4 35.88 90 bottom
R69  33R  [R0201]  43.38 50.65 0 bottom
R70  10K  [R0402]  26.44 16.01 90 top
R71  33R  [R0201]  47.11 53.52 270 bottom
R72  33R  [R0201]  43.38 49.09 0 bottom
R73  10K  [R0402]  60.1 39.52 0 bottom
R74  10K  [R0402]  60.1 40.46 0 bottom
R75  10K  [R0402]  60.1 41.42 0 bottom
R76  10K  [R0402]  60.1 45.52 0 bottom
R77  10K  [R0402]  60.1 46.48 0 bottom
R78  10K  [R0402]  60.1 44.58 0 bottom
R79  33R  [R0201]  35.86 44.07 0 bottom
R80  0R  [R0201]  33.54 43.28 0 bottom
R81  1K  [R0402]  1.84 47.06 270 bottom
R82  10K  [R0402]  13.86 47.27 270 bottom
R83  1K  [R0402]  1.84 45.23 270 bottom
R84  2.2k  [R0402]  13.86 49.12 270 bottom
R85  2.2k  [R0402]  15.86 49.67 180 bottom
R86  1K  [R0402]  14.29 40.07 180 bottom
R87  1K  [R0402]  14.29 41.02 0 bottom
R88  240R  [R0402]  16.2 52.47 0 bottom
R89  7.5K  [R0402]  44.93 24.26 180 top
R90  10K  [R0201]  37.62 53.96 0 top
R91  10K  [R0201]  38.83 53.96 0 top
R92  10K  [R0201]  40.31 53.95 0 top
R93  10K  [R0201]  41.54 53.95 0 top
R94  10K  [R0402]  22.76 68.3 0 bottom
R95  33R  [R0201]  43.87 59.41 180 bottom
R96  33R  [R0201]  42.72 58.99 180 bottom
R97  33R  [R0201]  43.87 58.64 180 bottom
R98  33R  [R0201]  54.48 58.68 90 bottom
R99  0R  [R0402]  56.06 50.91 270 bottom
R100  49.9R  [R0402]  57.1 33.21 270 top
R101  49.9R  [R0402]  56.16 33.21 270 top
R102  2K  [R0402]  60.85 33.21 270 top
R103  2K  [R0402]  59.92 33.21 270 top
R104  0R  [R0402]  58.04 33.21 90 top
R105  0R  [R0402]  58.98 33.21 270 top
R106  0R  [R0402]  57.1 29.57 270 top
R107  0R  [R0402]  56.16 29.57 270 top
R108  0R  [R0402]  59.92 29.57 270 top
R109  0R  [R0402]  60.85 29.57 270 top
R110  2.2k  [R0402]  50.14 54.63 90 bottom
R111  2.2k  [R0402]  56.02 59.46 180 bottom
R112  2.2k  [R0402]  57.83 52.76 0 bottom
R113  2.2k  [R0402]  53.47 59.01 90 bottom
R114  2.2k  [R0402]  50.54 50.25 270 bottom
R115  2.2k  [R0402]  51.48 50.25 270 bottom
R116  2.2k  [R0402]  56.01 58.5 0 bottom
R117  100K  [R0402]  75.16 58.74 90 bottom
R118  1M  [R0402]  75.43 52.52 90 bottom
R119  0R  [R0402]  75.43 50.67 270 bottom
R120  0R  [R0402]  64.74 53.47 0 bottom
R121  0R  [R0402]  64.74 54.73 0 bottom
R122  10K  [R0402]  35.23 44.15 180 top
R123  0R  [R0402]  17.86 15.11 90 top
R124  15K  [R0402]  16.87 15.11 270 top
R125  10K  [R0402]  49.96 67.46 0 bottom
R126  10K  [R0402]  24.99 42.46 90 bottom
R127  0R  [R0402]  23.22 40.74 0 bottom
R128  5.1K  [R0402]  8.61 9.27 90 top
R129  5.1K  [R0402]  5.57 9.26 90 top
R130  499R  [R0402]  22.78 57.98 90 top
R131  499R  [R0402]  22.32 66.87 90 bottom
R132  20K  [R0402]  24.23 66.87 90 bottom
R133  1K  [R0402]  22.56 19.96 180 bottom
R134  10K  [R0402]  34.45 36.34 90 bottom
R135  0R  [R0402]  47.76 45.62 0 bottom
R136  20K  [R0402]  23.75 15.98 270 top
R137  10K  [R0402]  19.76 31.41 270 bottom
R138  10K  [R0402]  20.73 31.4 270 bottom
R139  100K  [R0402]  20.72 33.82 90 bottom
R140  10K  [R0402]  53.13 67.8 180 top
R141  11K  [R0402]  19.76 33.81 270 bottom
R142  10K  [R0402]  47.63 67.82 0 top
R143  2.2k  [R0402]  26.36 34.06 0 bottom
R144  2.2k  [R0402]  26.36 35.03 0 bottom
R145  33R  [R0201]  36.5 58.47 180 bottom
R146  10K  [R0402]  36.66 24.31 90 top
R147  10K  [R0402]  35.73 24.31 270 top
R148  10K  [R0402]  33.51 36.33 90 bottom
R149  0R  [R0402]  35.23 45.16 0 top
R150  10K  [R0402]  50.75 27.41 180 bottom
R151  10K  [R0402]  6.65 33.79 90 bottom
R152  10K  [R0402]  23.75 17.83 90 top
R153  499R  [R0402]  23.29 66.87 90 bottom
R154  10K  [R0402]  5.19 37.6 270 bottom
R155  10K  [R0402]  7.8 37.61 270 bottom
R156  10K  [R0402]  8.99 33.78 90 bottom
R157  10K  [R0402]  5.18 33.79 90 bottom
R158  10K  [R0402]  7.8 33.79 270 bottom
R159  10K  [R0402]  10.01 12.98 180 top
R160  10K  [R0402]  14.55 9.78 90 top
R161  10K  [R0402]  7.87 17.22 0 bottom
R162  10K  [R0402]  30.33 31.32 180 top
R163  0R  [R0402]  30.33 32.28 180 top
R164  1K  [R0402]  60.74 17.89 180 bottom
R165  1K  [R0402]  45.85 70.98 90 bottom
R166  2.2k  [R0402]  72.5 23.26 180 bottom
R167  2.2k  [R0402]  74.31 23.26 180 bottom
R168  10K  [R0402]  3.13 62.53 90 bottom
R169  10K  [R0402]  44.08 76.79 270 bottom
R170  10K  [R0201]  40.31 53.17 0 top
R171  10K  [R0201]  37.62 53.2 0 top
R172  10K  [R0201]  37.62 52.41 0 top
R173  10K  [R0201]  40.31 52.41 0 top
R174  10K  [R0201]  37.62 51.43 0 top
R175  10K  [R0201]  40.31 51.43 0 top
R176  10K  [R0201]  37.62 49.87 0 top
R177  10K  [R0201]  37.62 49.09 0 top
R178  10K  [R0201]  37.62 50.65 0 top
R179  10K  [R0201]  40.31 50.65 0 top
R180  10K  [R0201]  40.31 49.09 0 top
R181  10K  [R0201]  40.31 49.87 0 top
R182  10K  [R0201]  37.62 48.12 0 top
R183  10K  [R0201]  40.31 48.12 0 top
R184  1K  [R0402]  2.17 62.53 270 bottom
R185  1K  [R0402]  2.61 63.93 0 bottom
R186  2.2k  [R0402]  62.42 67.96 0 top
R187  10K  [R0201]  41.54 53.17 0 top
R188  10K  [R0201]  38.83 53.2 0 top
R189  10K  [R0201]  38.83 52.41 0 top
R190  10K  [R0201]  41.54 52.41 0 top
R191  10K  [R0201]  38.83 51.43 0 top
R192  10K  [R0201]  41.54 51.43 0 top
R193  10K  [R0201]  38.83 49.87 0 top
R194  10K  [R0201]  38.83 49.09 0 top
R195  10K  [R0201]  38.83 50.65 0 top
R196  10K  [R0201]  41.54 50.65 0 top
R197  10K  [R0201]  41.54 49.09 0 top
R198  10K  [R0201]  41.54 49.87 0 top
R199  10K  [R0201]  38.83 48.12 0 top
R200  10K  [R0201]  41.54 48.12 0 top
R201  2.2k  [R0402]  36.8 44.91 0 bottom
R202  2.2k  [R0402]  1.9 31.21 180 bottom
R203  2.2k  [R0402]  1.9 30.27 180 bottom
R204  2.2k  [R0402]  1.93 29.35 180 bottom
R205  2.2k  [R0402]  1.93 28.41 180 bottom
R206  2.2k  [R0402]  76.22 20.87 0 bottom
R207  10K  [R0402]  66.52 24.94 0 bottom
R208  10K  [R0402]  48.05 67.46 180 bottom
R209  10K  [R0402]  32.33 36.33 90 bottom
R210  10K  [R0402]  22.56 71.9 0 bottom
R211  100K  [R0402]  29.02 70.91 0 bottom
R212  120K  [R0402]  29.04 71.85 0 bottom
R213  10K  [R0402]  31.4 36.32 270 bottom
R214  10K  [R0402]  11.68 9.78 270 top
R215  10K  [R0402]  10.72 9.78 270 top
R216  33R  [R0201]  40.31 52.41 180 bottom
R217  33R  [R0201]  23.6 42.79 270 bottom
R218  10K  [R0402]  55.45 70.86 180 bottom
R219  0R  [R0201]  11.22 72.8 90 top
R220  0R  [R0402]  58.01 50.91 90 bottom
R221  0R  [R0402]  57.04 50.92 90 bottom
R222  0R  [R0402]  58.31 48.68 90 bottom
R223  0R  [R0402]  52.41 50.23 270 bottom
R224  33R  [R0402]  53.8 49.79 0 bottom
R225  0R  [R0201]  10.72 72.8 90 top
R226  2.2k  [R0402]  64.59 67.96 0 top
R227  0R  [R0402]  22.52 42.47 270 bottom
R228  10K  [R0402]  17.32 16.56 180 top
R229  0R  [R0402]  41.05 69.55 90 bottom
R230  33R  [R0201]  40.31 53.95 180 bottom
R231  0R  [R0402]  52.8 48.86 180 bottom
R232  2.2k  [R0402]  42 76.79 90 bottom
R233  2.2k  [R0402]  47.59 76.79 90 bottom
R234  2.2k  [R0402]  48.93 46.98 180 bottom
R235  2.2k  [R0402]  48.93 48.24 180 bottom
R236  2.2k  [R0402]  76.19 21.67 0 bottom
R237  2.2k  [R0402]  76.19 22.47 0 bottom
R238  2.2k  [R0402]  76.19 23.28 0 bottom
R239  2.2k  [R0402]  55.35 66.29 180 bottom
R240  10K  [R0402]  7.01 74.48 90 bottom
R241  10K  [R0402]  7.98 74.48 90 bottom
R242  10K  [R0402]  7 76.31 90 bottom
R243  100K  [R0402]  6.06 76.31 90 bottom
R244  33R  [R0201]  26.68 42.79 90 bottom
R245  33R  [R0201]  43.38 49.87 0 bottom
R246  33R  [R0201]  43.33 51.43 0 bottom
R247  33R  [R0201]  43.38 48.12 0 bottom
R248  0R  [R0402]  40.12 69.56 270 bottom
R249  4.7K  [R0201]  32.2 68.52 0 bottom
R250  10K  [R0402]  38.52 76.79 270 bottom
R251  10K  [R0402]  35.9 42.88 0 bottom
R252  4.7K  [R0201]  32.2 68.52 180 top
R253  4.7K  [R0201]  43.76 69.24 90 bottom
R254  10K  [R0402]  64.6 71.7 0 top
R255  10K  [R0402]  62.42 71.7 180 top
R256  10K  [R0402]  41 23.55 0 top
R257  2.2k  [R0402]  48.05 27.61 180 top
R258  33R  [R0201]  46.39 24.38 180 top
R259  10K  [R0201]  51.13 63.63 270 bottom
R260  270K  [R0402]  22.63 32.48 90 bottom
R261  100K  [R0402]  21.69 32.48 90 bottom
R262  10K  [R0201]  48.26 63.63 90 bottom
R263  2.2k  [R0402]  39.57 59.86 90 bottom
R264  0R  [R0201]  9.72 72.81 90 top
R265  0R  [R0201]  9.22 72.81 90 top
R266  33R  [R0201]  37.62 52.41 180 bottom
R267  33R  [R0201]  37.62 53.2 180 bottom
R268  33R  [R0201]  40.31 53.17 180 bottom
R269  33R  [R0201]  37.62 53.96 180 bottom
R270  33R  [R0201]  37.62 51.43 180 bottom
R271  33R  [R0201]  40.31 51.43 180 bottom
R272  12K  [R0402]  52.78 47.9 180 bottom
R273  33R  [R0201]  29.28 43.25 270 top
R274  33R  [R0201]  25.78 42.11 270 top
R275  10K  [R0402]  54.18 48.41 270 bottom
R276  390K  [R0402]  69.06 27.08 0 bottom
R277  0R  [R0201]  34.39 71.35 270 bottom
R278  100K  [R0402]  63.09 26.9 90 bottom
R279  33R  [R0201]  36.5 57.4 180 top
R280  33R  [R0201]  35.05 57.05 180 top
R281  33R  [R0201]  36.5 57.05 180 bottom
R282  33R  [R0201]  35.05 57.4 180 bottom
R283  4.7K  [R0201]  43.76 69.24 270 top
R284  33R  [R0201]  36.5 56.69 180 top
R285  33R  [R0201]  35.05 56.34 180 top
R286  33R  [R0201]  36.5 55.98 180 top
R287  33R  [R0201]  36.5 55.27 180 top
R288  33R  [R0201]  35.05 56.69 180 bottom
R289  33R  [R0201]  35.05 55.63 180 top
R290  33R  [R0201]  36.5 56.34 180 bottom
R291  33R  [R0201]  35.05 55.98 180 bottom
R292  33R  [R0201]  36.5 55.63 180 bottom
R293  33R  [R0201]  35.05 55.27 180 bottom
R294  33R  [R0201]  36.5 54.91 180 bottom
R295  33R  [R0201]  35.05 54.91 180 top
R296  33R  [R0201]  36.5 54.53 180 top
R297  33R  [R0201]  35.05 58.12 180 bottom
R298  33R  [R0201]  36.5 57.76 180 bottom
R299  0R  [R0201]  25.22 12.78 270 bottom
R300  0R  [R0201]  25.72 12.78 270 bottom
R301  0R  [R0201]  26.21 14.64 270 bottom
R302  0R  [R0201]  26.71 14.64 270 bottom
R303  0R  [R0201]  27.21 12.47 270 bottom
R304  0R  [R0201]  27.71 12.47 270 bottom
R305  0R  [R0201]  29.72 11.69 0 bottom
R306  0R  [R0201]  29.72 12.19 0 bottom
R307  180K  [R0402]  24.03 32.92 0 bottom
R308  4.7K  [R0201]  44.79 69.24 90 bottom
R309  4.7K  [R0201]  44.79 69.24 270 top
R310  4.7K  [R0201]  45.85 69.21 90 bottom
R311  4.7K  [R0201]  45.85 69.21 270 top
R312  33R  [R0201]  28.17 39 90 bottom
R313  10K  [R0402]  4.53 17.95 0 top
R314  33R  [R0201]  29.09 39.01 90 bottom
R315  33R  [R0201]  27.35 42.78 270 bottom
R316  33R  [R0201]  34.7 49.63 270 top
R317  1K  [R0402]  76.3 8.42 90 top
R318  1K  [R0402]  76.28 10.3 270 top
SW1  TS23M-BN-PT-PF  [BUTTON2_3P_4D55X2D3X1D88MM]  77.95 21.72 270 top
SW2  TS23M-BN-PT-PF  [BUTTON2_3P_4D55X2D3X1D88MM]  77.95 32.55 270 top
SW3  TS23M-BN-PT-PF  [BUTTON2_3P_4D55X2D3X1D88MM]  77.95 65.28 270 top
TP1  Test Point  [TP35S_SMD]  11.01 67.44 270 top
TP2  Test Point  [TP35S_SMD]  29.43 44.95 90 top
TP3  Test Point  [TP35S_SMD]  24.57 42.89 270 top
TP4  Test Point  [TP35S_SMD]  62.18 63.27 180 top
TP5  Test Point  [TP35S_SMD]  64.06 63.27 180 top
TP6  Test Point  [TP35S_SMD]  60.66 73.23 0 top
TP7  Test Point  [TP35S_SMD]  73.36 73.15 0 top
TP8  Test Point  [TP30C_SMD]  34.36 70.15 180 bottom
TP9  Test Point  [TP35S_SMD]  71.61 69.34 0 top
TP10  Test Point  [TP35S_SMD]  73.36 70.61 0 top
TP11  Test Point  [TP35S_SMD]  5.29 42.06 90 top
TP12  Test Point  [TP35S_SMD]  65.22 53.73 90 top
TP13  Test Point  [TP35S_SMD]  10.03 46.89 90 top
TP14  Test Point  [TP35S_SMD]  65.22 55.53 270 top
TP15  Test Point  [TP35S_SMD]  16.74 44.73 90 top
TP16  Test Point  [TP35S_SMD]  27.09 42.9 90 top
TP17  Test Point  [TP35S_SMD]  74.57 63.55 180 top
TP18  Test Point  [TP35S_SMD]  19.86 18.01 90 top
TP19  Test Point  [TP35S_SMD]  20.57 31.62 270 top
TP20  Test Point  [TP35S_SMD]  39.14 22.73 0 top
TP21  Test Point  [TP35S_SMD]  3.28 40.97 90 top
TP22  Test Point  [TP35S_SMD]  19.25 12.67 90 top
TP23  Test Point  [TP35S_SMD]  8.25 12.23 90 top
TP24  Test Point  [TP35S_SMD]  8.2 14.31 90 top
TP25  Test Point  [TP35S_SMD]  6.78 15.67 90 top
TP26  Test Point  [TP35S_SMD]  55.35 67.46 0 top
TP27  Test Point  [TP35S_SMD]  30.64 69 0 top
TP28  Test Point  [TP35S_SMD]  72.5 63.55 180 top
TP29  Test Point  [TP35S_SMD]  71.61 74.42 0 top
TP30  Test Point  [TP35S_SMD]  71.61 71.88 0 top
U1  AM62x  [BGA425_0D5_13X13MM]  25.57 51.92 0 bottom
U2  16Gbit  [BGA96_T9_P8_10_3X13_3]  7.86 50.06 180 bottom
U3  EMMC16G-TB29-PZ90  [BGA153_P14_P5_11P5X13]  11.83 66.43 0 bottom
U4  TVS0500DRVR  [WSON6_0D65_2X2X0_8MM]  2.84 9.43 0 top
U5  WL1807MODGIMOC  [E-13_4X13_3-N100_0_75-TOP]  63.66 72.34 0 bottom
U6  RTL8211F-VD-CG  [QFN40_0D4_5X5MM]  38.83 64.12 180 bottom
U7  IT66121FN  [QFN64_0D5_9X9MM]  42.97 28.83 180 bottom
U8  TPD3S014DBVR  [SOT23_6]  22.69 15.62 0 bottom
U9  CC1352P7  [QFN48_0D5_7X7MM]  70.15 54.86 90 bottom
U10  SN74LVC2G241DCUR  [U_8_DCU]  25.89 20.02 0 top
U11  ADC102S051  [VSSOP8_0D65_3X3X1_1MM]  51.05 37.98 0 bottom
U12  TLV62595DMQR  [VSON6_0D5_1D5X1D5X1MM]  21.19 29 270 bottom
U13  DP83TD510ERHBR  [VQFN32_0D5_5X5MM]  53.72 54.97 270 bottom
U14  TVS0500DRVR  [WSON6_0D65_2X2X0_8MM]  71.32 26.58 90 bottom
U15  SKY13317-373LF  [SON8P_150X150X50MM]  71.4 43.54 180 bottom
U16  TLV75801PDBVR  [SOT23-5]  25.91 71.03 90 bottom
U17  TPS65219  [QFN32_5X5MM_TPS65219]  12.5 14.07 180 bottom
U18  BQ32002  [SOIC8_1D27_4_9X3_9MM]  28.89 29.51 180 bottom
U20  FT24C32A-ELRT  [SOT23-5]  29.08 35.38 180 bottom
U21  TPS22918DBVR  [SOT23_6]  57.86 35.34 270 bottom
U22  TPS25200DRVT  [WSON6_0D65_2X2X0_8MM]  66.57 26.63 180 bottom
X2  25MHz  [X4-SMD-2_5X2_0X1_0MM]  56.23 48.67 180 bottom
X3  32.768kHz  [X2_SMD_3_2X1_5MM]  64.5 49.38 90 bottom
X4  48MHz  [X4_SMD_2_0X1_6MM]  77 51.68 90 bottom
X5  32.768kHz  [X2_SMD_3_2X1_5MM]  18.11 41.37 180 bottom
X6  25MHz  [X4-SMD-3_2X2_5X1_0MM]  23.12 37.68 180 bottom
X7  32.768kHz  [X2_SMD_3_2X1_5MM]  33.91 29.35 270 bottom
Y2  25MHz  [X4-SMD-3_2X2_5X1_0MM]  37.68 70.54 0 bottom

## Library data of the parts
B1 = 0900PC15A0036E
C1-C57 C60-C64 C80 C82-C86 C88-C90 C93 C96 C98 C103-C106 C108-C113 C125-C235 C237-C253 C255-C260 C262 C263 C266-C282 C295 = CC
C58 C59 C65-C68 C70-C74 C76 C78 C79 C81 C87 C92 C94 C99-C102 C107 C114-C124 C236 C254 C264 C294 C296-C298 C300 = CC: signal model: DEFAULT_CAPACITOR_100000pF_1_2
C69 C75 C77 C91 C95 C299 = CC: signal model: DEFAULT_CAPACITOR_4.7e+06pF_1_2
C97 = CC: signal model: DEFAULT_CAPACITOR_1000pF_1_2
C261 C265 = CC: signal model: DEFAULT_CAPACITOR_22.000000pF_1_2
D1 D2 = D_ESD_DIFFPAIR
D3 D11 D12 D21-D23 D32-D35 D46-D51 D53-D56 D58 D59 D61 D63 D66 = D
D4 D5 D7-D10 D13-D20 D24-D31 D36-D45 D52 D57 D60 D73 D74 = DIODE TVS BI-DIR
F1 = Fuse
FB1-FB29 FB32-FB35 FL2 = FB
FB30 FB31 FB36-FB39 R1-R4 R16-R19 R21 R23-R37 R39-R78 R81-R109 R117-R161 R164 R165 R168-R238 R240-R318 = R
J1 = MicroSD Card_9+4P
J2 = RJ11_6P4C_SHIELDED
J3 J5 J9 J12 = RF ANT 3P
J4 = HDMI_Type A_19P
J6 = Header 1x3
J7 J18 = Header_4+2P
J8 = Header 40+2P
J10 = BAT Holder 2P
J11 J19 = Header 2X5_1
J13 = Single USB A_180D
J14 = USB2.0_Type C_16+6P#1
J16 = Header 1x2
J17 = FPC 22+2P
J21 = Header MikroBus
J24 = RJ45_LPJG0933H11NL
L1 L2 = CLT
L3 L5-L12 L14 L16-L19 = L
L4 L13 L15 L20-L24 = CL
LED1-LED11 = Single LED
MH1-MH4 = MHole
OSC1 OSC2 = OSC_4P
Q3 Q4 Q6-Q10 Q13 Q14 = NMOS_123
Q5 = PMOS_123
Q12 = PNPx2_126_453
R5-R13 R20 R22 = R: signal model: DEFAULT_RESISTOR_49900OHM_1_2
R14 R15 R162 = R: signal model: DEFAULT_RESISTOR_10000OHM_1_2
R38 R163 = R: signal model: DEFAULT_RESISTOR_0.001OHM_1_2
R79 R80 = R: signal model: R_R0201_DISCRETE_33R_33R
R110-R116 R166 R167 R239 = R: signal model: DEFAULT_RESISTOR_2200OHM_1_2
SW1-SW3 = Tactile Switch_2+3P
TP1-TP30 = Test Point
U1 = AM62x_BGA425
U2 = DDR4_FBGA96
U3 = eMMC_1
U4 U14 = TVS0500DRVR
U5 = WL1807MOD
U6 = RTL8211
U7 = IT66121_QFN64
U8 = TPD3S014D_SOT23-6
U9 = CC1352P1F3RGZ
U10 = SN74LVC2G241
U11 = ADC102S051
U12 = TLV62595DMQR
U13 = DP83TD510E
U15 = SKY13317-373LF
U16 = LDO_5P_FB_EN
U17 = TPS65219
U18 = DS1339_8P
U20 = MEM_24LC32_SOT23-5
U21 = TPS22918DBV
U22 = TPS25200DRV
X2 X4 X6 = XTAL_4P
X3 X5 X7 = XTAL_2P
Y2 = XTAL_4P_2

## Footprints (pads in the part's own frame, mm; a bottom-side part is the same pattern mirrored in y, then rotated)
BAT-CR1220
  round 1.524 hole 1.524 unplated: (0,3.7) (0,-3.7)
  rect 2.032x4.47 smd: 1(0,8.2) 2(0,-8.2)
BF10_0D5_2X1D25X1MM
  rrect 0.6x0.3 smd: 1(-0.625,0.75) 2(-0.625,0.25) 3(-0.625,-0.25) 4(-0.625,-0.75) 6(0.625,-0.75) 7(0.625,-0.25) 8(0.625,0.25) 9(0.625,0.75)
  rrect 0.3x0.6 smd: 5(0,-1) 10(0,1)
BGA96_T9_P8_10_3X13_3
  round 0.356 smd: A1(-3.2,6.001) A2(-2.4,6.001) A3(-1.6,6.001) A7(1.6,6.001) A8(2.4,6.001) A9(3.2,6.001) B1(-3.2,5.201) B2(-2.4,5.201) B3(-1.6,5.201) B7(1.6,5.201) B8(2.4,5.201) B9(3.2,5.201) C1(-3.2,4.401) C2(-2.4,4.401) C3(-1.6,4.401) C7(1.6,4.401) C8(2.4,4.401) C9(3.2,4.401) D1(-3.2,3.6) D2(-2.4,3.6) D3(-1.6,3.6) D7(1.6,3.6) D8(2.4,3.6) D9(3.2,3.6) E1(-3.2,2.8) E2(-2.4,2.8) E3(-1.6,2.8) E7(1.6,2.8) E8(2.4,2.8) E9(3.2,2.8) F1(-3.2,2) F2(-2.4,2) F3(-1.6,2) F7(1.6,2) F8(2.4,2) F9(3.2,2) G1(-3.2,1.2) G2(-2.4,1.2) G3(-1.6,1.2) G7(1.6,1.2) G8(2.4,1.2) G9(3.2,1.2) H1(-3.2,0.4) H2(-2.4,0.4) H3(-1.6,0.4) H7(1.6,0.4) H8(2.4,0.4) H9(3.2,0.4) J1(-3.2,-0.4) J2(-2.4,-0.4) J3(-1.6,-0.4) J7(1.6,-0.4) J8(2.4,-0.4) J9(3.2,-0.4) K1(-3.2,-1.2) K2(-2.4,-1.2) K3(-1.6,-1.2) K7(1.6,-1.2) K8(2.4,-1.2) K9(3.2,-1.2) L1(-3.2,-2) L2(-2.4,-2) L3(-1.6,-2) L7(1.6,-2) L8(2.4,-2) L9(3.2,-2) M1(-3.2,-2.8) M2(-2.4,-2.8) M3(-1.6,-2.8) M7(1.6,-2.8) M8(2.4,-2.8) M9(3.2,-2.8) N1(-3.2,-3.6) N2(-2.4,-3.6) N3(-1.6,-3.6) N7(1.6,-3.6) N8(2.4,-3.6) N9(3.2,-3.6) P1(-3.2,-4.401) P2(-2.4,-4.401) P3(-1.6,-4.401) P7(1.6,-4.401) P8(2.4,-4.401) P9(3.2,-4.401) R1(-3.2,-5.201) R2(-2.4,-5.201) R3(-1.6,-5.201) R7(1.6,-5.201) R8(2.4,-5.201) R9(3.2,-5.201) T1(-3.2,-6.001) T2(-2.4,-6.001) T3(-1.6,-6.001) T7(1.6,-6.001) T8(2.4,-6.001) T9(3.2,-6.001)
BGA153_P14_P5_11P5X13
  round 0.254 smd: A1(-3.25,3.25) A2(-2.75,3.25) A3(-2.25,3.25) A4(-1.75,3.25) A5(-1.25,3.25) A6(-0.75,3.25) A7(-0.25,3.25) A8(0.25,3.25) A9(0.75,3.25) A10(1.25,3.25) A11(1.75,3.25) A12(2.25,3.25) A13(2.75,3.25) A14(3.25,3.25) B1(-3.25,2.75) B2(-2.75,2.75) B3(-2.25,2.75) B4(-1.75,2.75) B5(-1.25,2.75) B6(-0.75,2.75) B7(-0.25,2.75) B8(0.25,2.75) B9(0.75,2.75) B10(1.25,2.75) B11(1.75,2.75) B12(2.25,2.75) B13(2.75,2.75) B14(3.25,2.75) C1(-3.25,2.25) C2(-2.75,2.25) C3(-2.25,2.25) C4(-1.75,2.25) C5(-1.25,2.25) C6(-0.75,2.25) C7(-0.25,2.25) C8(0.25,2.25) C9(0.75,2.25) C10(1.25,2.25) C11(1.75,2.25) C12(2.25,2.25) C13(2.75,2.25) C14(3.25,2.25) D1(-3.25,1.75) D2(-2.75,1.75) D3(-2.25,1.75) D4(-1.75,1.75) D12(2.25,1.75) D13(2.75,1.75) D14(3.25,1.75) E1(-3.25,1.25) E2(-2.75,1.25) E3(-2.25,1.25) E5(-1.25,1.25) E6(-0.75,1.25) E7(-0.25,1.25) E8(0.25,1.25) E9(0.75,1.25) E10(1.25,1.25) E12(2.25,1.25) E13(2.75,1.25) E14(3.25,1.25) F1(-3.25,0.75) F2(-2.75,0.75) F3(-2.25,0.75) F5(-1.25,0.75) F10(1.25,0.75) F12(2.25,0.75) F13(2.75,0.75) F14(3.25,0.75) G1(-3.25,0.25) G2(-2.75,0.25) G3(-2.25,0.25) G5(-1.25,0.25) G10(1.25,0.25) G12(2.25,0.25) G13(2.75,0.25) G14(3.25,0.25) H1(-3.25,-0.25) H2(-2.75,-0.25) H3(-2.25,-0.25) H5(-1.25,-0.25) H10(1.25,-0.25) H12(2.25,-0.25) H13(2.75,-0.25) H14(3.25,-0.25) J1(-3.25,-0.75) J2(-2.75,-0.75) J3(-2.25,-0.75) J5(-1.25,-0.75) J10(1.25,-0.75) J12(2.25,-0.75) J13(2.75,-0.75) J14(3.25,-0.75) K1(-3.25,-1.25) K2(-2.75,-1.25) K3(-2.25,-1.25) K5(-1.25,-1.25) K6(-0.75,-1.25) K7(-0.25,-1.25) K8(0.25,-1.25) K9(0.75,-1.25) K10(1.25,-1.25) K12(2.25,-1.25) K13(2.75,-1.25) K14(3.25,-1.25) L1(-3.25,-1.75) L2(-2.75,-1.75) L3(-2.25,-1.75) L12(2.25,-1.75) L13(2.75,-1.75) L14(3.25,-1.75) M1(-3.25,-2.25) M2(-2.75,-2.25) M3(-2.25,-2.25) M4(-1.75,-2.25) M5(-1.25,-2.25) M6(-0.75,-2.25) M7(-0.25,-2.25) M8(0.25,-2.25) M9(0.75,-2.25) M10(1.25,-2.25) M11(1.75,-2.25) M12(2.25,-2.25) M13(2.75,-2.25) M14(3.25,-2.25) N1(-3.25,-2.75) N2(-2.75,-2.75) N3(-2.25,-2.75) N4(-1.75,-2.75) N5(-1.25,-2.75) N6(-0.75,-2.75) N7(-0.25,-2.75) N8(0.25,-2.75) N9(0.75,-2.75) N10(1.25,-2.75) N11(1.75,-2.75) N12(2.25,-2.75) N13(2.75,-2.75) N14(3.25,-2.75) P1(-3.25,-3.25) P2(-2.75,-3.25) P3(-2.25,-3.25) P4(-1.75,-3.25) P5(-1.25,-3.25) P6(-0.75,-3.25) P7(-0.25,-3.25) P8(0.25,-3.25) P9(0.75,-3.25) P10(1.25,-3.25) P11(1.75,-3.25) P12(2.25,-3.25) P13(2.75,-3.25) P14(3.25,-3.25)
